# Altium PCB PCB5.2.3.PcbDoc
Units mil, origin at the board's own origin, x right, y up, seen from the top; angles counter-clockwise.
Board outline 6000 x 4000 mil, 2 copper layers (Top Layer, Bottom Layer); 26 components, 66 nets, 268 pads, 56 vias.
Unrouted connection lines stored in the file: 3.
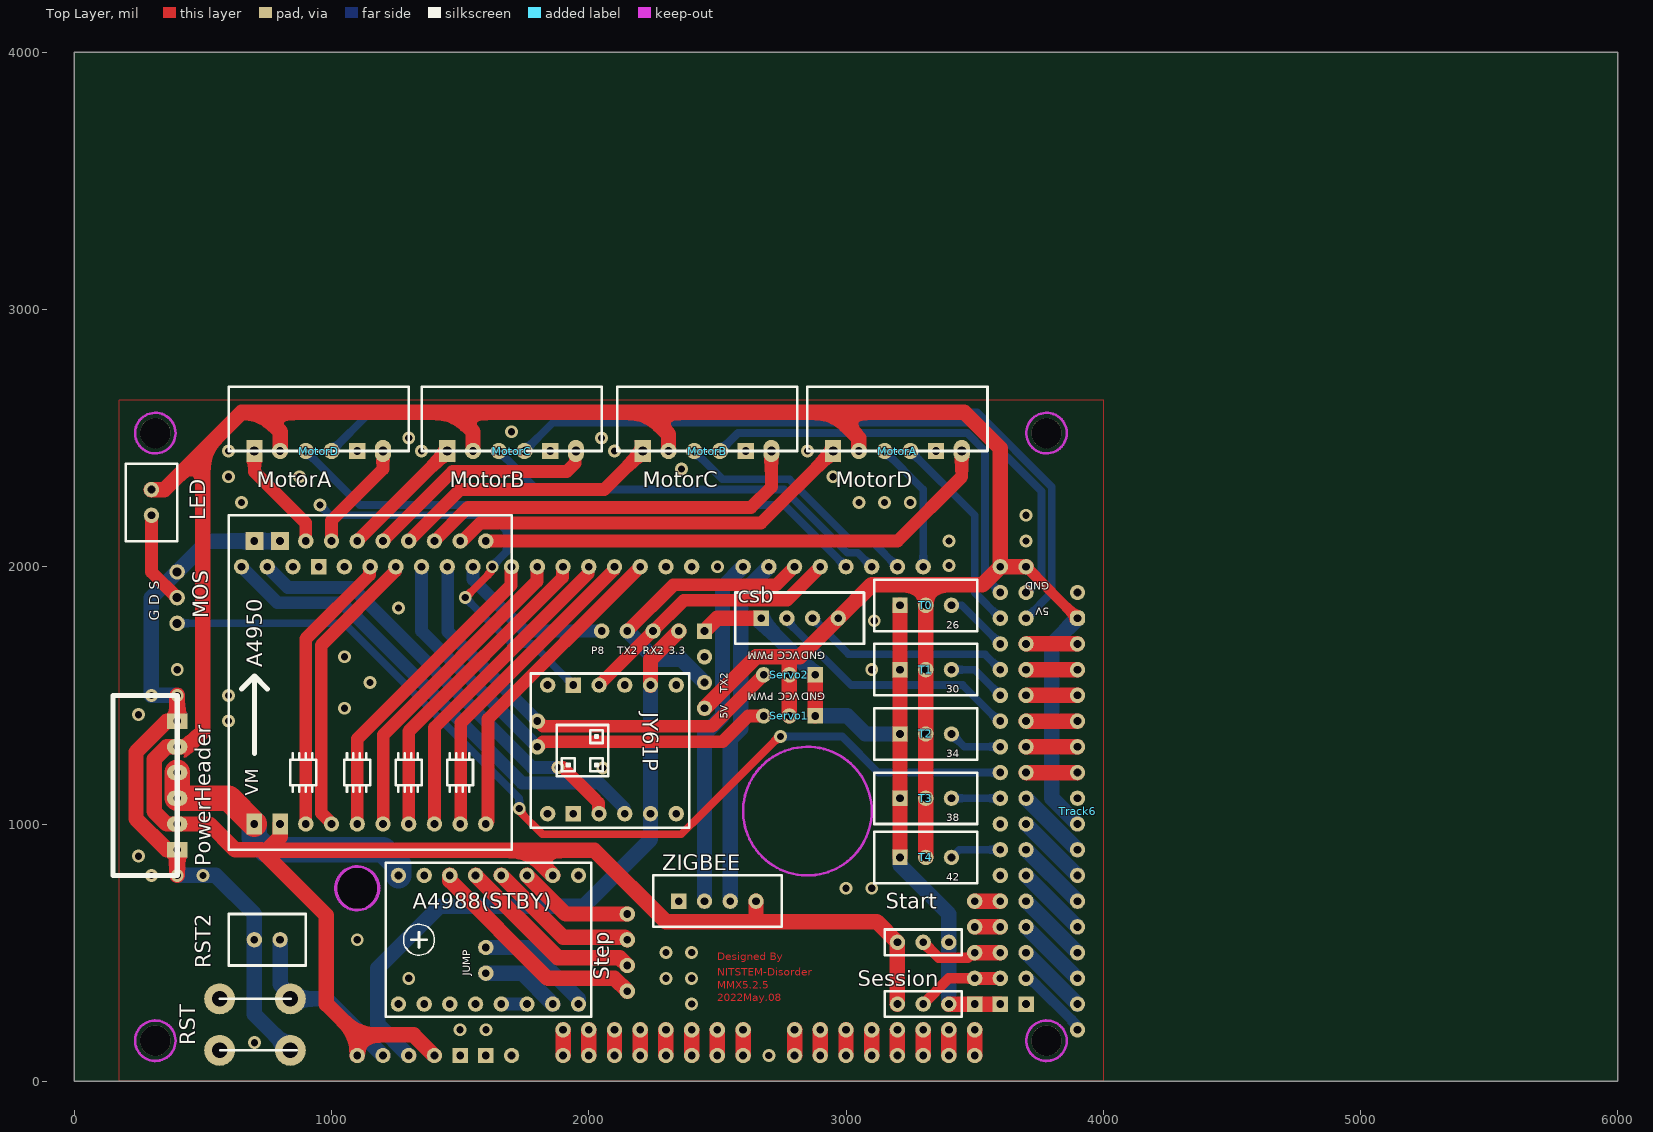
[diagram p0: Top Layer view]
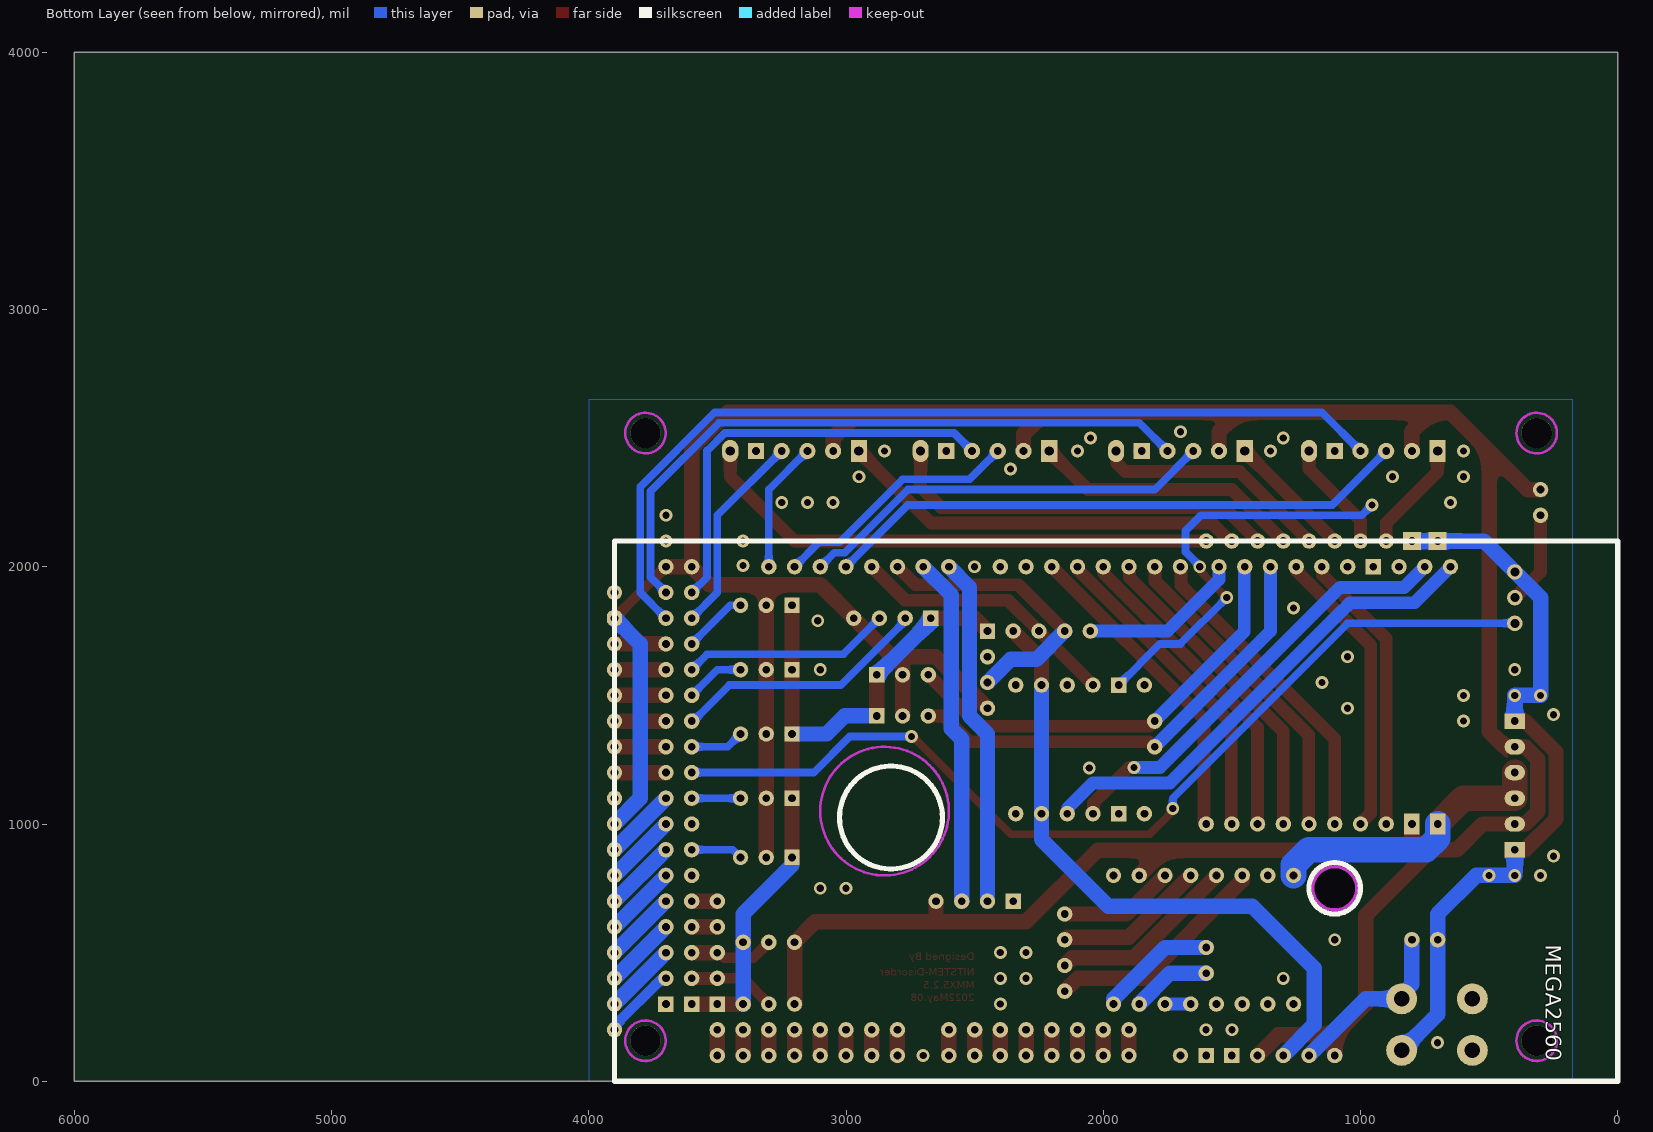
[diagram p1: Bottom Layer view, seen from below]

## Layer stack, top to bottom
Top Solder: solder mask 0.4, Solder Resist, Dk 3.5
Top Layer: signal copper 1.4
Dielectric 1: dielectric 12.6, FR-4, Dk 4.8
Bottom Layer: signal copper 1.4
Bottom Solder: solder mask 0.4, Solder Resist, Dk 3.5

## Board outline
0,0 6000,0 6000,4000 0,4000
cut-out: 1020,750 ccw(c1100,750) 1100,670 ccw(c1100,750) 1180,750 ccw(c1100,750) 1100,830 ccw(c1100,750)

## Design rules (kind name [scope] priority, off if disabled: settings)
Clearance [All] p1: gap=10 ignorepadtopadclearanceinfootprint=FALSE except(0: Arc-Hole Track-Hole SMDPad-Hole THPad-Hole Via-Hole Fill-Hole Poly-Hole Region-Hole Text-Hole)
PolygonConnect [All] p1: connectstyle=Relief reliefconductorwidth=20 reliefentries=4 polygonreliefangle="90 Angle" airgapwidth=10
RoutingVias [All] p1: holewidth=28 width=50 viastyle="Through Hole" minholewidth=28 minwidth=50 maxholewidth=28 maxwidth=50
SolderMaskExpansion [All] p1: expansion=4 istentingtop=FALSE
Width [All] p1: maxlimit=100 minlimit=10 preferedwidth=50 minimp=50.000000 maximp=50.000000 favimp=50.000000
30 further rules are at their usual default settings.

## Classes and differential pairs
component class Sheet5.1.5-2: A4950 A4988(STBY) csb JY61P LED MEGA2560 MOS MotorA MotorB MotorC MotorD PowerHeader RST RST2 Session Start Step T0 T1 T2 T3 T4 Track6 ZIGBEE

## Components (designator, comment, footprint, x,y, rotation, side; value= is the part's Value field where it differs from the comment)
A4950 "自制A4950" 自制A4950 1700,900 r90 top locked
A4988(STBY) "A4988" A4988 1960,300 r90 top
csb "超声波" 超声波 2970,1800 r180 top
JY61P "JY61P" JY61P 1775,1585 r270 top
LED "SwitchFree0" SWITCHFREE 300,2300 r0 top
MEGA2560 "Mega2560" MEGA2560 3900,0 r180 bottom locked
MOS "MOS" MOS 400,1780 r90 top
MotorA "Motor" MOTOR 3550,2450 r90 top locked
MotorB "Motor" MOTOR 2810,2450 r90 top locked
MotorC "Motor" MOTOR 2050,2450 r90 top locked
MotorD "Motor" MOTOR 1300,2450 r90 top locked
PowerHeader "PowerHeader" POWERHEADER 400,1400 r0 top locked
RST "Switch0" SWITCH0 565,320 r0 top
RST2 "SwitchFree0" SWITCHFREE 800,550 r270 top
Servo1 "Servo" SERVO 2880,1420 r180 top
Servo2 "Servo" SERVO 2880,1580 r180 top
Session "Switch3" SWITCH3 3200,300 r90 top
Start "Switch3" SWITCH3 3200,540 r90 top
Step "StepMotor" STEPMOTOR 2150,650 r0 top
T0 "Track1" TRACK1 3210,1850 r0 top
T1 "Track1" TRACK1 3210,1600 r0 top
T2 "Track1" TRACK1 3210,1350 r0 top
T3 "Track1" TRACK1 3210,1100 r0 top
T4 "Track1" TRACK1 3210,870 r0 top
Track6 "Track" TRACK 3900,1200 r180 top
ZIGBEE "ZIGBEE" ZIGBEE 2650,700 r270 top

## Footprints (in the part's own frame and the unit in brackets; to place one, negate y for a bottom-side part, rotate by r counter-clockwise, add the part's x,y. Pads: shape width x height; smd on the part's side, far side on the other; paste and mask are expansions set on the pad)
A4988 [mil]
  round 60 hole 30: 1A(500,300) 1B(500,200) 2A(500,400) 2B(500,500) DIR(0,0) ENA(0,700) GND(500,600) GND(500,0) MS1(0,600) MS2(0,500) MS3(0,400) RST(0,300) SLEEP(0,200) STEP(0,100) VDD(500,100) VMOT(500,700)
  silkscreen extent -50,-50 550,750
JY61P [mil]
  round 60 hole 30: D0(45,565) D1(45,65) D2(545,565) D3(545,65) RX(45,365) SCL(545,365) SDA(545,265) TX(45,265) VCC(45,465) VCC(545,465)
  rect 60x60 hole 30: GND(45,165) GND(545,165)
  silkscreen extent 0,0 600,615
MEGA2560 [mil] "单片机"
  round 60 hole 30: 3.3V(2600,100) 5V(200,2000) 5V(300,2000) 5V(2500,100) 5V(2800,100) A0(2000,100) A1(1900,100) A2(1800,100) A3(1700,100) A4(1600,100) A5(1500,100) A6(1400,100) A7(1300,100) A8(1100,100) A9(1000,100) A10(900,100) A11(800,100) A12(700,100) A13(600,100) A14(500,100) A15(400,100) AREF(3050,2000) D22(300,1900) D23(200,1900) D24(300,1800) D25(200,1800) D26(300,1700) D27(200,1700) D28(300,1600) D29(200,1600) D30(300,1500) D31(200,1500) D32(300,1400) D33(200,1400) D34(300,1300) D35(200,1300) D36(300,1200) D37(200,1200) D38(300,1100) D39(200,1100) D40(300,1000) D41(200,1000) D42(300,900) D43(200,900) D44(300,800) D45(200,800) D46(300,700) D47(200,700) D48(300,600) D49(200,600) D50(300,500) D51(200,500) D52(300,400) D53(200,400) P2(1700,2000) P3(1800,2000) P4(1900,2000) P5(2000,2000) P6(2100,2000) P7(2200,2000) P8(2350,2000) P9(2450,2000) P10(2550,2000) P11(2650,2000) P12(2750,2000) P13(2850,2000) RESET(2700,100) RX0(1500,2000) RX1(900,2000) RX2(1000,2000) RX3(1200,2000) SCL(3250,2000) SCL1(600,2000) SDA(3150,2000) SDA1(700,2000) TX0(1600,2000) TX1(800,2000) TX2(1100,2000) TX3(1300,2000) VIN(2200,100)
  rect 60x60 hole 30: GND(200,300) GND(300,300) GND(2300,100) GND(2400,100) GND(2950,2000)
  silkscreen extent 0,0 3900,2100
MOS [mil]
  round 60 hole 35: D(100,0) G(0,0) S(200,0)
MOTOR [mm]
  round 1.6 hole 0.762: A(0,10.16) B(0,7.62) VCC(0,12.7)
  rect 1.6x1.6 hole 0.762: GND(0,5.08)
  oval 2.2x1.6 hole 0.9: O1(0,2.54)
  rect 2.2x1.6 hole 0.92: O2(0,15.24)
  silkscreen extent 0,0 6.35,17.78
POWERHEADER [mil]
  oval 80x60 hole 30: 5V(0,-400) 5V(0,-100) 12V(0,-300) 12V(0,-200)
  rect 80x60 hole 30: GND(0,-500) GND(0,0)
  silkscreen extent -250,-600 0,100
SERVO [mil]
  rect 60x60 hole 30: GND(0,0)
  round 60 hole 30: PWM(200,0) VCC(100,0)
STEPMOTOR [mil]
  round 60 hole 30: 1A(0,-100) 1B(0,0) 2A(0,-200) 2B(0,-300)
SWITCH0 [mil]
  round 120 hole 60: 1(0,0) 1(275,0) 2(0,-200) 2(275,-200)
  silkscreen extent 0,-200 300,0
SWITCH3 [mil]
  round 60 hole 30: HIGH(0,0) LOW(0,-200) PIN(0,-100)
  silkscreen extent -50,-250 50,50
SWITCHFREE [mil]
  round 60 hole 30: 1(0,0) 2(0,-100)
  silkscreen extent -100,-200 100,100
TRACK [mil]
  round 60 hole 30: 1(0,-500) 2(0,-400) 3(0,-300) 4(0,-200) 5(0,-100) 6(0,0) 7(0,300) 8(0,400) 9(0,500) 10(0,600) 11(0,700) 12(0,800) 13(0,900) 14(0,1000) GND(0,-700)
  rrect75% 60x60 hole 30: VCC(0,-600)
TRACK1 [mil]
  rect 60x60 hole 30: GND(0,0)
  round 60 hole 30: OUT(200,0) VCC(100,0)
  silkscreen extent -100,-100 300,100
ZIGBEE [mil]
  rect 60x60 hole 30: GND(0,-300)
  round 60 hole 30: RX(0,-200) TX(0,-100) VCC(0,0)
  silkscreen extent -100,-400 100,100
自制A4950 [mil]
  round 60 hole 30: AIN1(100,100) AIN2(100,200) AO1(1200,100) AO2(1200,200) BIN1(100,300) BIN2(100,400) BO1(1200,300) BO2(1200,400) CIN1(100,500) CIN2(100,600) CO1(1200,500) CO2(1200,600) DIN1(100,700) DIN2(100,800) DO1(1200,700) DO2(1200,800)
  rect 70x70 hole 30: GND(1200,900) GND(1200,1000)
  rect 80x60 hole 30: VCC(100,900) VM(100,1000)
  silkscreen extent 0,0 1300,1100
超声波 [mil]
  round 60 hole 30: Echo(200,0) Trig(100,0) VCC(0,0)
  rect 60x60 hole 30: GND(300,0)
  silkscreen extent -100,-100 400,100

## Free pads (board coordinates)
  round 60 hole 30: 170(1900,200) 171(2000,200) 172(2100,200) 173(2200,200) 174(2300,200) 176(2400,200) 177(2500,200) 178(2600,200) 179(2800,200) 180(2900,200) 181(3000,200) 182(3100,200) 183(3200,200) 184(3300,200) 185(3400,200) 186(3500,200) 249(2250,1750) 250(2150,1750) 252(2050,1750) 253(2350,1750) 313(3900,1000) 314(3900,1100) 325(3500,700) 326(3500,600) 327(1600,520) 328(1600,420) 331(1800,1300) 332(1800,1400) 333(2450,1650) 334(2450,1550) 335(2450,1450) 338(3500,500) 339(3500,400)
  round 118.11 hole 118.11: 244(314.96,2519.68) 245(3779.53,2519.68) 246(3779.53,157.48) 247(314.96,157.48)
  rect 60x60 hole 30: 255(2450,1750) 340(3500,300)

## Via types
v1: diameter 50, hole 28, Top Layer to Bottom Layer, 56 vias

## Nets (pads, with @x,y where several pads share a name; then routed paths per layer and width w, separated by ;. In a path a pad name is that pad's centre, name@x,y a point inside that pad or via, vN(x,y) a via of type N, cw(c..) or ccw(c..) an arc to the next point about the centre after c; other vN are vias at no path point)
3.3V: JY61P.VCC MEGA2560.3.3V pad.253 | length 2512.4
  Top Layer w60: JY61P.VCC@2240,1540 2240,1640 pad.253
  Bottom Layer w60: MEGA2560.3.3V 1180,220 1180,440 1420,680 1980,680 2240,940 2240,1040 JY61P.VCC@2240,1540
5V: A4950.VCC A4988(STBY).VDD csb.VCC LED.1 MEGA2560.5V MotorA.VCC MotorB.VCC MotorC.VCC MotorD.VCC pad.313 pad.335 PowerHeader.5V Servo1.VCC Servo2.VCC Session.HIGH Start.HIGH T0.VCC T1.VCC T2.VCC T3.VCC T4.VCC Track6.VCC ZIGBEE.VCC | length 15106.4
  Top Layer w40: MEGA2560.5V@3700,2000 Track6.VCC
  Top Layer w60: LED.1 350,2300 500,2450 ; PowerHeader.5V@390,1300 358.99,1300 310,1251.01 310,1048.99 358.99,1000 400,1000 525,1000 625,900 727.28,900 727.28,897.72 747.72,897.72 ; PowerHeader.5V@400,1300 440,1300 500,1360 500,2450 ; A4950.VCC 800,950 747.72,897.72 ; MotorD.VCC 800,2525 725,2600 ; MEGA2560.5V@1100,100 1100,180 ; MEGA2560.5V@1400,100 1398.99,100 1318.99,180 1100,180 ; MotorC.VCC 1550,2525 1475,2600 ; 1860,800 1762.28,897.72 ; MotorB.VCC 2310,2515 2225,2600 ; pad.335 2650,1650 2780,1650 ; ZIGBEE.VCC 2650,630 2660,620 ; Servo1.VCC Servo2.VCC 2780,1650 ; MotorA.VCC 3049.43,2450.57 3049.43,2500.57 2950,2600 ; Session.HIGH Start.HIGH 3120,620 2660,620 ; T4.VCC T3.VCC T2.VCC T1.VCC T0.VCC 3310,1930 ; MEGA2560.5V@3700,2000 MEGA2560.5V@3600,2000 ; 500,2450 650,2600 725,2600 ; 725,2600 1475,2600 ; 747.72,897.72 1762.28,897.72 ; 747.72,897.72 737.5,887.5 980,645 980,300 1100,180 ; 1475,2600 2225,2600 ; 1762.28,897.72 2022.28,897.72 2300,620 2660,620 ; 2225,2600 2950,2600 ; 2780,1650 2820,1650 csb.VCC 3100,1930 3310,1930 ; 2950,2600 3460,2600 3600,2460 MEGA2560.5V@3600,2000 ; 3310,1930 3530,1930 MEGA2560.5V@3600,2000
  Bottom Layer w60: MEGA2560.5V@1100,100 MEGA2560.5V@1101.01,100 ; pad.313 3800,1100 3800,1700 Track6.VCC
12V: A4950.VM A4988(STBY).VMOT PowerHeader.12V | length 1140.7
  Top Layer w100: PowerHeader.12V@400,1200 400,1100 600,1100 A4950.VM
  Bottom Layer w100: A4950.VM 700,945.15 745.15,900 1201.42,900 1260,841.42 1260,800
AO1: A4950.AO1 MotorA.O1 | length 2053.6
  Top Layer w50: A4950.AO1 3200,2100 3450,2350 MotorA.O1
AO2: A4950.AO2 MotorA.O2 | length 1601.9
  Top Layer w50: A4950.AO2 1501.91,2101.91 1509.99,2101.91 1578.08,2170 2670,2170 2931.69,2431.69 2943.5,2431.69 2950,2438.19 MotorA.O2
BO1: A4950.BO1 MotorB.O1 | length 1537
  Top Layer w50: A4950.BO1 1530,2230 2630,2230 2710,2310 MotorB.O1
BO2: A4950.BO2 MotorB.O2 | length 1061.9
  Top Layer w50: A4950.BO2 1500,2300 2060,2300 2191.69,2431.69 2203.5,2431.69 2210,2438.19 MotorB.O2
CO1: A4950.CO1 MotorC.O1 | length 920.9
  Top Layer w50: A4950.CO1 1470,2370 1914.21,2370 1947.51,2403.3 1947.51,2447.51 MotorC.O1
CO2: A4950.CO2 MotorC.O2 | length 501.9
  Top Layer w50: A4950.CO2 1431.69,2431.69 1443.5,2431.69 1450,2438.19 MotorC.O2
DirA: MEGA2560.D24 MotorA.B | length 795
  Bottom Layer w30: MotorA.B 3500,2200 3500,1900 MEGA2560.D24
DirB: MEGA2560.D22 MotorB.B | length 1663.8
  Bottom Layer w30: MotorB.B 2580,2520 3471.71,2520 3540,2451.71 3540,1960 MEGA2560.D22
DirC: MEGA2560.D23 MotorC.B | length 2584.3
  Bottom Layer w30: MotorC.B 1860,2560 3493.43,2560 3760,2293.43 3760,1960 MEGA2560.D23
DirD: MEGA2560.D25 MotorD.B | length 3533.7
  Bottom Layer w30: MotorD.B 1150,2600 3510,2600 3800,2310 3800,1900 MEGA2560.D25
DO1: A4950.DO1 MotorD.O1 | length 432.8
  Top Layer w50: A4950.DO1 1000,2180 1200,2380 MotorD.O1
DO2: A4950.DO2 MotorD.O2 | length 432.8
  Top Layer w50: MotorD.O2 700.43,2449.57 700.43,2369.57 900,2170 A4950.DO2
EncA: MEGA2560.SCL1 MotorA.A | length 512.1
  Bottom Layer w30: MotorA.A 3300,2300 MEGA2560.SCL1
EncB: MEGA2560.SDA1 MotorB.A | length 976.4
  Bottom Layer w30: MotorB.A 2520,2340 2780,2340 3025,2095 3105,2095 MEGA2560.SDA1
EncC: MEGA2560.TX1 MotorC.A | length 1636.4
  Bottom Layer w30: MotorC.A 1800,2300 2760,2300 3005,2055 3045,2055 MEGA2560.TX1
EncD: MEGA2560.RX1 MotorD.A | length 2286.4
  Bottom Layer w30: MotorD.A 1110,2240 2760,2240 MEGA2560.RX1
GND: A4950.GND A4988(STBY).GND csb.GND JY61P.GND MEGA2560.GND MOS.S MotorA.GND MotorB.GND MotorC.GND MotorD.GND pad.255 pad.314 pad.340 PowerHeader.GND RST2.2 RST.2 Servo1.GND Servo2.GND Session.LOW Start.LOW T0.GND T1.GND T2.GND T3.GND T4.GND Track6.GND ZIGBEE.GND | length 7611.7
  Top Layer w30: v1(1520,1880) 1621.17,1981.17 1621.17,1996.17 v1(1625,2000)
  Top Layer w60: v1(400,800) 400,900 360,900 240,1020 240,1280 360,1400 400,1400 v1(400,1500) ; pad.255 2500,1800 csb.GND ; Servo1.GND Servo2.GND ; T4.GND T3.GND T2.GND T1.GND T0.GND ; Session.LOW pad.340 MEGA2560.GND@3600,300
  Bottom Layer w30: v1(955,2240) 995,2200 1620,2200 1680,2140 1680,2057.78 1625,2002.78 v1(1625,2000) ; v1(1520,1880) 1700,1700 1780,1700 JY61P.GND@1940,1540
  Bottom Layer w60: PowerHeader.GND@400,900 v1(400,800) v1(500,800) 550,800 700,650 RST2.2 700,260 RST.2@840,120 ; PowerHeader.GND@400,1400 v1(400,1500) v1(300,1500) 300,1880 MOS.S 520,2100 700,2100 A4950.GND@800,2100 ; MotorC.GND MotorC.GND@1851.5,2448.5 ; csb.GND 2670,1790 Servo2.GND ; 2920,1420 3005,1420 3075,1350 T2.GND ; T4.GND 3210,840 3400,650 Start.LOW Session.LOW
  other v1: 2700,100 700,150 1500,200 1600,200 2400,300 1300,400 2300,400 2400,400 2300,500 2400,500 1100,550 3000,750 3100,750 300,800 250,875 2054.55,1218.21 600,1400 250,1425 1050,1450 600,1500 1150,1550 400,1600 3100,1600 1050,1650 3110,1790 1260,1840 2500,2000 3400,2005 3400,2100 3700,2100 3700,2200 650,2250 3050,2250 3150,2250 3250,2250 600,2350 875,2350 2950,2350 2360,2380 600,2450 1350,2450 2100,2450 2850,2450 1300,2500 2050,2500 1700,2525
MOS-LED: MEGA2560.D36 MOS.G | length 3774.3
  Top Layer w30: v1@1730,1050 1820,960 2360,960 2440,1040 2740,1340 v1(2745,1340)
  Bottom Layer w30: MOS.G 1050,1780 1730,1100 v1(1730,1060) ; v1(2745,1340) 2985,1340 3125,1200 MEGA2560.D36
NetA4988(STBY)_1A: A4988(STBY).1A Step.1A | length 593.6
  Top Layer w60: 1660,800 1900,560 2140,560 Step.1A
NetA4988(STBY)_1B: A4988(STBY).1B Step.1B | length 452.1
  Top Layer w60: 1760,800 1910,650 Step.1B
NetA4988(STBY)_2A: A4988(STBY).2A Step.2A | length 735
  Top Layer w60: 1560,800 1880,480 2120,480 Step.2A
NetA4988(STBY)_2B: A4988(STBY).2B Step.2B | length 888.1
  Top Layer w60: 1460,800 1460,780 1840,400 2100,400 Step.2B
NetA4988(STBY)_RST: A4988(STBY).RST A4988(STBY).SLEEP | length 100
  Bottom Layer w50: 1660,300 1760,300
Netcsb_Echo: csb.Echo MEGA2560.D32 | length 1001.5
  Bottom Layer w30: csb.Echo 2770,1791.88 2785,1776.88 2785,1775 3020,1540 3453.43,1540 3593.43,1400 MEGA2560.D32
Netcsb_Trig: csb.Trig MEGA2560.D28 | length 812.8
  Bottom Layer w30: csb.Trig 3010,1660 3540,1660 MEGA2560.D28
NetLED_2: LED.2 MOS.D | length 361.4
  Top Layer w50: LED.2 300,1980 MOS.D
NetMEGA2560_D26: MEGA2560.D26 T0.OUT | length 252.1
  Bottom Layer w30: T0.OUT 3450,1850 MEGA2560.D26
NetMEGA2560_D27: MEGA2560.D27 Track6.1 | length 200
  Top Layer w60: MEGA2560.D27 Track6.1
NetMEGA2560_D29: MEGA2560.D29 Track6.2 | length 200
  Top Layer w60: MEGA2560.D29 Track6.2
NetMEGA2560_D30: MEGA2560.D30 T1.OUT | length 231.4
  Bottom Layer w30: T1.OUT 3500,1600 MEGA2560.D30
NetMEGA2560_D31: MEGA2560.D31 Track6.3 | length 200
  Top Layer w60: MEGA2560.D31 Track6.3
NetMEGA2560_D33: MEGA2560.D33 Track6.4 | length 200
  Top Layer w60: MEGA2560.D33 Track6.4
NetMEGA2560_D34: MEGA2560.D34 T2.OUT | length 210.7
  Bottom Layer w30: T2.OUT 3460,1300 MEGA2560.D34
NetMEGA2560_D35: MEGA2560.D35 Track6.5 | length 200
  Top Layer w60: MEGA2560.D35 Track6.5
NetMEGA2560_D37: MEGA2560.D37 Track6.6 | length 200
  Top Layer w60: MEGA2560.D37 Track6.6
NetMEGA2560_D38: MEGA2560.D38 T3.OUT | length 190
  Bottom Layer w30: T3.OUT MEGA2560.D38
NetMEGA2560_D39: MEGA2560.D39 Track6.7 | length 282.8
  Bottom Layer w60: MEGA2560.D39 Track6.7
NetMEGA2560_D41: MEGA2560.D41 Track6.8 | length 282.8
  Bottom Layer w60: MEGA2560.D41 Track6.8
NetMEGA2560_D42: MEGA2560.D42 T4.OUT | length 200.5
  Bottom Layer w30: T4.OUT@3408.46,878.46 3418.46,878.46 3440,900 MEGA2560.D42
NetMEGA2560_D43: MEGA2560.D43 Track6.9 | length 282.8
  Bottom Layer w60: MEGA2560.D43 Track6.9
NetMEGA2560_D45: MEGA2560.D45 Track6.10 | length 282.8
  Bottom Layer w60: MEGA2560.D45 Track6.10
NetMEGA2560_D47: MEGA2560.D47 Track6.11 | length 282.8
  Bottom Layer w60: MEGA2560.D47 Track6.11
NetMEGA2560_D49: MEGA2560.D49 Track6.12 | length 282.8
  Bottom Layer w60: MEGA2560.D49 Track6.12
NetMEGA2560_D51: MEGA2560.D51 Track6.13 | length 282.8
  Bottom Layer w60: MEGA2560.D51 Track6.13
NetMEGA2560_D53: MEGA2560.D53 Track6.14 | length 261.4
  Top Layer w40: MEGA2560.D53 MEGA2560.D53@3703.83,396.17 ; Track6.14@3896.17,203.83 Track6.14
  Bottom Layer w40: MEGA2560.D53@3718.97,396.17 Track6.14@3896.17,218.97
NetMEGA2560_RESET: MEGA2560.RESET RST2.1 RST.1 | length 677.7
  Bottom Layer w60: RST2.1 800,376.24 840,336.24 RST.1@840,320 ; RST.1@860,320 980,320 MEGA2560.RESET
PWMA1: A4950.AIN1 MEGA2560.P2 | length 1248.5
  Top Layer w50: A4950.AIN1 1600,1002.71 1607.78,1010.48 1607.78,1407.78 MEGA2560.P2
PWMA2: A4950.AIN2 MEGA2560.P3 | length 1248.5
  Top Layer w50: A4950.AIN2 1501.91,1001.91 1501.91,1008.98 1502.56,1009.63 1502.56,1392.56 2098.09,1988.09 2098.09,1998.09 MEGA2560.P3
PWMB1: A4950.BIN1 MEGA2560.P4 | length 1248.5
  Top Layer w50: A4950.BIN1 1400,1375.44 1998.09,1973.53 1998.09,1998.09 MEGA2560.P4
PWMB2: A4950.BIN2 MEGA2560.P5 | length 1248.5
  Top Layer w50: A4950.BIN2 1300,1360.29 1898.09,1958.38 1898.09,1998.09 MEGA2560.P5
PWMC1: A4950.CIN1 MEGA2560.P6 | length 1248.5
  Top Layer w50: A4950.CIN1 1201.12,1001.12 1201.12,1346.27 1798.09,1943.23 1798.09,1998.09 MEGA2560.P6
PWMC2: A4950.CIN2 MEGA2560.P7 | length 1248.5
  Top Layer w50: A4950.CIN2 1100,1330 1698.09,1928.09 1698.09,1998.09 MEGA2560.P7
PWMD1: A4950.DIN1 MEGA2560.P11 | length 1136.7
  Top Layer w50: A4950.DIN1 1000,1002.71 960,1042.71 960,1695.15 1248.09,1983.23 1248.09,1998.09 MEGA2560.P11
PWMD2: A4950.DIN2 MEGA2560.P12 | length 1103.6
  Top Layer w50: A4950.DIN2 900,1720 1148.09,1968.09 1148.09,1998.09 MEGA2560.P12
RX2: JY61P.TX MEGA2560.RX2 pad.249 | length 1050.5
  Top Layer w50: JY61P.TX pad.249 2370,1870 2770,1870 MEGA2560.RX2
RX3: MEGA2560.RX3 ZIGBEE.TX | length 1362.1
  Bottom Layer w60: ZIGBEE.TX 2550,1330 2590,1370 2590,1890 MEGA2560.RX3
SCL0: JY61P.SCL MEGA2560.SCL | length 1897.8
  Bottom Layer w50: MEGA2560.SCL 790,1860 1040,1860 1070,1830 1070.71,1830 1740.71,1160 2040,1160 2138.09,1061.91 2138.09,1044.62 JY61P.SCL@2141.91,1044.62
SDA0: JY61P.SDA MEGA2560.SDA | length 1711.1
  Top Layer w50: v1(1880,1220) 1900,1220 2020,1100 2038.09,1081.91 2038.09,1041.91 JY61P.SDA
  Bottom Layer w50: MEGA2560.SDA 830,1920 1080,1920 1780,1220 v1(1880,1220)
Session: MEGA2560.D52 pad.339 Session.PIN | length 341.4
  Top Layer w40: Session.PIN 3400,400 pad.339
  Top Layer w50: pad.339 MEGA2560.D52
Start: MEGA2560.D50 pad.338 Start.PIN | length 333.1
  Top Layer w40: Start.PIN 3360,480 3474.59,480 3494.59,500 pad.338
  Top Layer w60: pad.338 MEGA2560.D50
stbyPWM1: A4988(STBY).STEP MEGA2560.P10 pad.328 pad.331 Servo1.PWM | length 2125.8
  Top Layer w50: pad.331 1802.71,1300 1822.71,1320 2520,1320 2620,1420 Servo1.PWM
  Bottom Layer w50: MEGA2560.P10 1350,1750 pad.331
  Bottom Layer w60: pad.328 1740,420 1860,300
stbyPWM2: A4988(STBY).DIR MEGA2560.P9 pad.327 pad.332 Servo2.PWM | length 2176.2
  Top Layer w50: pad.332 1802.71,1400 1822.71,1380 2480,1380 Servo2.PWM@2678.09,1578.09
  Bottom Layer w50: MEGA2560.P9 1451.91,1998.09 1451.91,1748.09 pad.332
  Bottom Layer w60: pad.327 1760,520 1960,320 1960,300
TX3: MEGA2560.TX3 ZIGBEE.RX | length 1362.1
  Bottom Layer w60: ZIGBEE.RX 2450,1350 2520,1420 2520,1920 MEGA2560.TX3
pads on no net: A4988(STBY).ENA A4988(STBY).MS1 A4988(STBY).MS2 A4988(STBY).MS3 JY61P.D0 JY61P.D1 JY61P.D2 JY61P.D3 JY61P.RX MEGA2560.A0 MEGA2560.A1 MEGA2560.A2 MEGA2560.A3 MEGA2560.A4 MEGA2560.A5 MEGA2560.A6 MEGA2560.A7 MEGA2560.A8 MEGA2560.A9 MEGA2560.A10 MEGA2560.A11 MEGA2560.A12 MEGA2560.A13 MEGA2560.A14 MEGA2560.A15 MEGA2560.AREF MEGA2560.D40 MEGA2560.D44 MEGA2560.D46 MEGA2560.D48 MEGA2560.P8 MEGA2560.P13 MEGA2560.RX0 MEGA2560.TX0 MEGA2560.TX2 MEGA2560.VIN
copper on no net: | length 3569.2
  Top Layer w50: 2150,1750 2330,1930 2730,1930 2800,2000
  Top Layer w60: 1900,100 1900,200 ; 2000,100 2000,200 ; 2100,100 2100,200 ; 2200,100 2200,200 ; 2300,100 2300,200 ; 2400,100 2400,200 ; 2500,100 2500,200 ; 2600,100 2600,200 ; 2800,100 2800,200 ; 2900,100 2900,200 ; 3000,100 3000,200 ; 3100,100 3100,200 ; 3200,100 3200,200 ; 3300,100 3300,200 ; 3400,100 3400,200 ; 3500,100 3500,200 ; 3500,600 3600,600 ; 3500,700 3600,700
  Bottom Layer w50: 1550,2000 1550,1950 1750,1750 2050,1750
  Bottom Layer w60: 2150,1750 2260,1640 2360,1640 2450,1550

## Polygon pours and split planes (outlines as drawn)
GND on Bottom Layer "GND_L02_P-001" (solid, remove dead copper, shelved, pour order 4): 175,2650 4000,2650 4000,0 175,0
GND on Top Layer "GND_L02_P-001" (solid, remove dead copper, shelved, pour order 5): 175,2650 4000,2650 4000,0 175,0

## Keep-outs
Keep-Out Layer:
  circle w10: c1100,750 r85
  circle w10: c314.96,157.48 r78.74
  circle w10: c3779.53,157.48 r78.74
  circle w10: c3779.53,2519.68 r78.74
  circle w10: c314.96,2519.68 r78.74
  circle w10: c2850,1050 r250

## Other copper
Top Layer:
  text "Designed By" at 2500,470 h30
  text "NITSTEM-Disorder" at 2500,410 h30
  text "MMX5.2.5" at 2500,360 h30
  text "2022May.08" at 2500,310 h30

## Silkscreen, mask and mechanical layers (free items; w line width, h text height)
Top Overlay:
  text "MotorA" at 710,2310 h60
  text "MotorB" at 1460,2310 h60
  text "MotorC" at 2210,2310 h60
  text "MotorD" at 2960,2310 h60
  text "G D S" at 330,1790 h40 r90
  text "26" at 3390,1760 h30
  text "P8" at 2010,1660 h30
  text "TX2" at 2110,1660 h30
  text "RX2" at 2210,1660 h30
  text "3.3" at 2310,1660 h30
  text "TX2" at 2540,1510 h30 r90
  text "30" at 3390,1510 h30
  text "5V" at 2540,1410 h30 r90
  text "34" at 3390,1260 h30
  text "38" at 3390,1010 h30
  text "42" at 3390,780 h30
  text "JUMP" at 1540,410 h30 r90
Mechanical 1:
  circle w20: c2850,1050 r240
  circle w20: c1100,750 r80
  lines w20: 175,0 4000,0 4000,2650 175,2650 175,0

## Text inside footprints (layer, text, board x,y; h text height)
A4950: Top Overlay "VM" at 715,1110 h50 r90
Servo1: Top Overlay "PWM" at 2720,1510 h30 r180; Top Overlay "VCC" at 2820,1510 h30 r180; Top Overlay "GND" at 2920,1510 h30 r180
Servo2: Top Overlay "PWM" at 2720,1670 h30 r180; Top Overlay "VCC" at 2820,1670 h30 r180; Top Overlay "GND" at 2920,1670 h30 r180
Track6: Top Overlay "5V" at 3790,1840 h30 r180; Top Overlay "GND" at 3790,1940 h30 r180